# Altium PCB CmosTest20231115V2.PcbDoc (part 2 of 2)
Units mm, origin at the board's own origin, x right, y up, seen from the top; angles counter-clockwise.
Board outline 62.13 x 36.24 mm, 6 copper layers (Top Layer, GND, Signal Layer 1, Signal Layer 2, power, Bottom Layer), stack 1.231 mm thick; 74 components, 61 nets, 321 pads, 164 vias.
Unrouted connection lines stored in the file: 1.
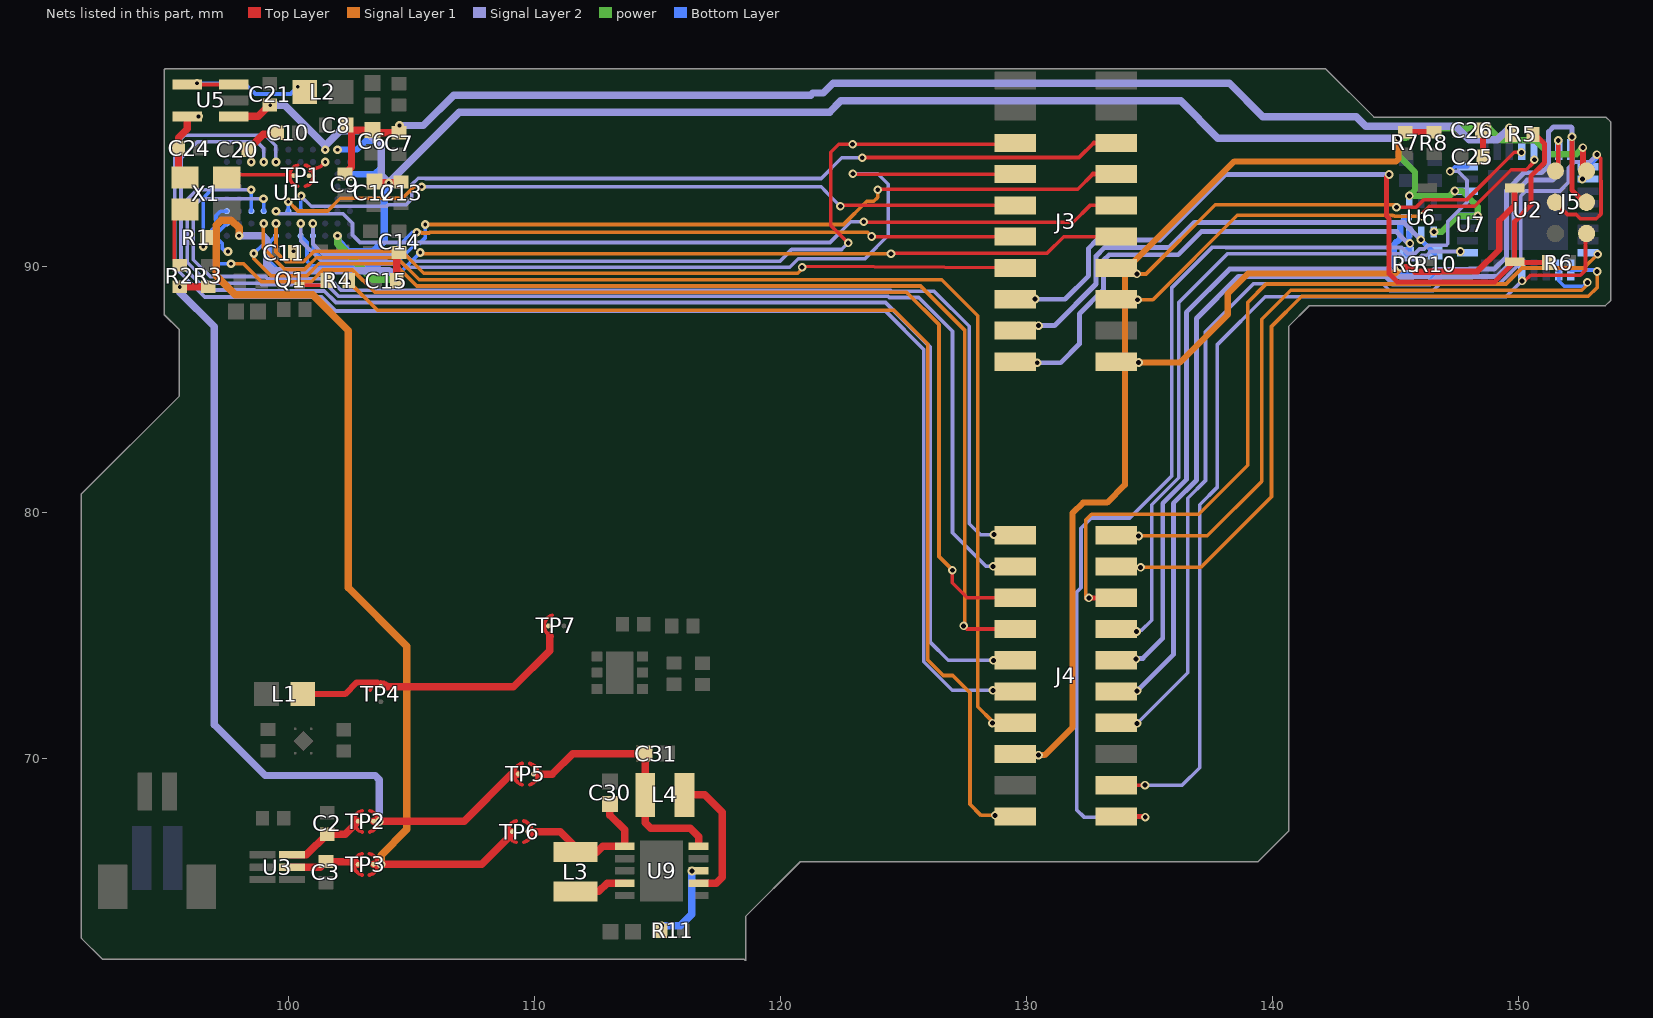
[diagram p6: the nets of this part, all layers, seen from the top]

## Via types
v1: diameter 0.35, hole 0.2, Top Layer to Bottom Layer, tented both sides, 97 vias
v2: diameter 0.35, hole 0.15, Top Layer to Bottom Layer, tented both sides, 53 vias
v3: diameter 0.356, hole 0.2, Top Layer to Bottom Layer, tented both sides, 13 vias
v4: diameter 0.356, hole 0.178, Top Layer to Bottom Layer, tented both sides, 1 vias

## Nets (pads, with @x,y where several pads share a name; then routed paths per layer and width w, separated by ;. In a path a pad name is that pad's centre, name@x,y a point inside that pad or via, vN(x,y) a via of type N, cw(c..) or ccw(c..) an arc to the next point about the centre after c; other vN are vias at no path point) (continued)
NetJ3_5: J3.5 U1.B8 | length 34.8
  Top Layer w0.15: v1(122.75,90.96) 122.04,91.67 122.04,94.64 122.37,94.97 v1(122.93,94.97) 129.485,94.97 J3.5@129.54,95.025
  Signal Layer 2 w0.15: v2(101,91.75) 101,90.914 101.414,90.5 104.75,90.5 105.03,90.22 119.98,90.22 120.45,90.69 122.49,90.69 122.49,90.7 v1(122.75,90.96)
NetJ3_6: J3.6 U1.C7 | length 35.3
  Top Layer w0.15: v1@123.4,94.43 132.13,94.43 132.725,95.025
  Top Layer w0.2: 132.725,95.025 J3.6@133.64,95.025
  Signal Layer 2 w0.15: v2(100.52,92.87) 100.52,92.86 100.93,92.45 104,92.45 104.06,92.51 104.78,92.51 105.01,92.74 105.01,93.325 105.275,93.59 105.565,93.59 105.575,93.58 121.65,93.58 122.49,94.42 v1(123.32,94.42)
  Bottom Layer w0.15: U1.C7@100.5,92.25 100.5,92.85 v2(100.52,92.87)
NetJ3_7: J3.7 U1.B7 | length 35.9
  Top Layer w0.15: v1@122.93,93.755 J3.7@129.54,93.755
  Signal Layer 2 w0.15: v2(100.5,91.75) 100.5,91.06 101.36,90.2 104.57,90.2 104.8,89.97 120.37,89.97 120.72,90.32 123.43,90.32 124.38,91.27 124.38,93.34 123.95,93.77 v1(122.94,93.77) v1@122.95,93.76
NetJ3_8: J3.8 U1.A7 | length 36.1
  Top Layer w0.15: v1@123.95,93.14 132.08,93.14 132.695,93.755
  Top Layer w0.2: 132.695,93.755 J3.8@133.64,93.755
  Signal Layer 1 w0.15: v2(105.57,91.71) 122.56,91.71 123.5,92.65 123.79,92.65 123.95,92.81 v1(123.95,93.12)
  Bottom Layer w0.15: U1.A7@100.5,91.25 100.76,90.99 100.76,90.22 100.947,90.032 103.699,90.032 103.757,90.09 104.35,90.09 105.06,90.8 105.095,90.8 105.215,90.92 105.31,90.92 105.57,91.18 v2(105.57,91.71)
NetJ3_9: J3.9 U1.C6 | length 30.8
  Top Layer w0.15: v1@122.455,92.485 J3.9@129.54,92.485
  Signal Layer 1 w0.15: v2(100,92.63) 100.02,92.63 100.39,92.26 101.6,92.26 102.11,92.77 104.636,92.77 105.106,93.24 v2(105.42,93.24)
  Signal Layer 2 w0.15: v2(105.42,93.24) 121.65,93.24 121.86,93.03 121.86,93.02 v1(122.43,92.45)
  Bottom Layer w0.15: U1.C6@100,92.25 v2(100,92.63)
NetJ3_10: J3.10 U1.C5 | length 35.5
  Top Layer w0.15: v1@123.45,91.8 131.89,91.8 132.575,92.485 J3.10@133.64,92.485
  Signal Layer 2 w0.15: v2(99.5,92.25) 99.61,92.14 102.23,92.14 102.61,91.76 102.61,91.28 102.91,90.98 122.01,90.98 122.85,91.82 v1(123.38,91.82)
NetJ3_11: J3.11 U1.A8 | length 29.8
  Top Layer w0.15: v1@123.7,91.215 J3.11@129.54,91.215
  Signal Layer 1 w0.15: v2(105.22,91.39) 105.395,91.39 105.425,91.36 105.715,91.36 105.745,91.39 123.53,91.39 v1(123.7,91.22)
  Bottom Layer w0.15: U1.A8@101,91.25 101.01,91.24 101.01,90.66 101.388,90.282 103.596,90.282 103.653,90.34 103.99,90.34 105.04,91.39 v2(105.22,91.39)
NetJ3_12: J3.12 U1.A5 | length 36.3
  Top Layer w0.15: v1@124.53,90.54 130.83,90.54 131.505,91.215 J3.12@133.64,91.215
  Signal Layer 1 w0.15: v2(105.36,90.57) 105.41,90.52 v1(124.49,90.52)
  Bottom Layer w0.15: U1.A5@99.5,91.25 99.27,91.02 99.27,90.19 99.677,89.783 103.803,89.783 103.86,89.84 104.63,89.84 v2(105.36,90.57)
NetJ3_13: J3.13 U1.B5 | length 32
  Top Layer w0.15: v1@120.95,90.01 J3.13@129.54,89.945
  Signal Layer 1 w0.15: v2(99.5,91.75) 99.5,90.59 99.9,90.19 100.613,90.19 101.043,90.62 104.61,90.62 105.5,89.73 120.7,89.73 120.88,89.91 v1(120.88,89.97)
NetJ3_14: J3.14 U2.12 | length 17.8
  Top Layer w0.15: v1(145.03,92.41) 145.85,92.41 145.845,92.415 146.15,92.72 147.89,92.72 149.81,94.64 v1(150.1,94.64)
  Signal Layer 1 w0.15: v1(134.48,89.7) 134.85,89.7 137.66,92.51 144.93,92.51 v1(145.03,92.41)
NetJ3_15: J3.15 R5.2 R6.1 U7.1 | length 34.2
  Top Layer w0.2: v1(144.73,93.74) 144.62,93.63 144.62,92.06 144.72,91.96 144.72,89.72 145.06,89.38 149.018,89.38 U7.1@149.827,90.189 ; R5.2@150.595,95.39 R5.2@150.575,95.37 150.66,95.37 151.04,94.99 151.04,94.219 150.49,93.669 150.49,92.49 149.827,91.827 U7.1@149.827,90.189 ; R6.1@151.185,90.16 149.856,90.16 U7.1@149.827,90.189
  Signal Layer 2 w0.2: v1(130.34,88.68) 130.35,88.67 131.56,88.67 132.52,89.63 132.52,90.74 132.86,91.08 135.41,91.08 138.07,93.74 v1(144.73,93.74)
NetJ3_16: J3.16 U2.13 | length 18.5
  Top Layer w0.15: v1@146.01,92.1 146.36,92.45 148.21,92.45 149.695,93.935 150.295,93.935 150.55,94.19 v1@150.55,94.26
  Signal Layer 1 w0.15: v1(134.51,88.65) 135.13,88.65 138.56,92.08 144.865,92.08 144.885,92.06 144.933,92.06 144.953,92.04 v1(146.06,92.04)
  other v1: 150.63,94.34
NetJ3_17: J3.17 R10.1 U6.6 | length 19.8
  Top Layer w0.2: J3.17@129.54,87.405 J3.17@130.255,87.405
  Signal Layer 2 w0.2: v1(130.48,87.6) 131.13,87.6 132.82,89.29 132.82,90.42 133.18,90.78 135.8,90.78 136.81,91.79 145.32,91.79 v1(146.02,91.09)
  Bottom Layer w0.2: v1(146.02,91.09) 146.572,90.538 R10.1@146.6,90.538
NetJ3_19: J3.19 R9.1 U6.7 | length 20.5
  Signal Layer 2 w0.2: v1(130.43,86.09) 131.38,86.09 132.15,86.86 132.15,88.08 133.12,89.05 133.12,90.25 133.35,90.48 136.16,90.48 137.1,91.42 145.02,91.42 v1@145.57,90.87 ; v1(145.57,90.94) v1@145.57,90.87 ; v1@145.58,90.86 v1@145.57,90.87
  Bottom Layer w0.2: R9.1@145.44,90.538 145.385,90.593 145.385,90.634 R9.1@145.54,90.789 ; R9.1@145.54,90.638 R9.1@145.54,90.789 ; U6.7@145.54,91.405 R9.1@145.54,90.79 ; v1(145.57,90.94) 145.57,90.9 145.61,90.86 R9.1@145.54,90.79
  Bottom Layer w0.254: R9.1@145.44,90.538 R9.1@145.54,90.638
NetJ4_1: J4.1 U1.C4 | length 47.5
  Signal Layer 2 w0.15: v2(98.99,92.76) 96.46,92.76 96.14,92.44 96.14,90.281 96.825,89.595 99.055,89.595 99.14,89.51 101.671,89.51 102.141,89.04 124.471,89.04 124.521,88.99 126.25,88.99 127.67,87.57 127.67,79.55 128.12,79.1 v1@128.67,79.1
  Bottom Layer w0.15: v2(98.99,92.76) 99,92.75 U1.C4@99,92.25
  other v1: 128.67,79.11
NetJ4_2: J4.2 U2.26 | length 28.2
  Signal Layer 1 w0.15: v1@134.55,79.06 137.34,79.06 139.55,81.27 139.55,87.86 140.73,89.04 152.55,89.04 152.78,89.27 v1(152.78,89.36)
  Bottom Layer w0.15: U2.26@151.616,89.856 151.616,89.424 151.84,89.2 152.62,89.2 v1(152.78,89.36)
  other v1: 134.55,79.05
NetJ4_3: J4.3 U1.C3 | length 48.9
  Signal Layer 2 w0.15: v2(98.5,93.12) 96.29,93.12 95.89,92.72 95.89,90.177 96.749,89.319 98.839,89.319 98.897,89.26 101.567,89.26 102.037,88.79 124.367,88.79 124.417,88.74 125.62,88.74 126.99,87.37 126.99,79.18 128.35,77.82 v1(128.64,77.82)
  Bottom Layer w0.15: U1.C3@98.5,92.25 v2(98.5,93.12)
NetJ4_4: J4.4 U2.25 | length 29
  Signal Layer 1 w0.15: v1(134.63,77.78) 137.08,77.78 139.95,80.65 139.95,87.56 141.18,88.79 152.82,88.79 153.18,89.15 v1(153.18,89.8)
  Bottom Layer w0.15: U2.25@152.115,89.856 153.124,89.856 v1(153.18,89.8)
NetJ4_5: J4.5 U1.C1 | length 46.9
  Top Layer w0.15: v1(126.98,77.66) 126.98,77.15 127.59,76.54 J4.5@129.54,76.54
  Signal Layer 1 w0.15: v2(97.67,90.11) 98.18,90.11 98.91,89.38 100.93,89.38 101.41,89.86 102.61,89.86 103.51,88.96 125.12,88.96 126.44,87.64 126.44,78.22 v1@126.99,77.67
  Bottom Layer w0.15: U1.C1@97.5,92.25 97.25,92.25 97.06,92.06 97.06,91.659 96.9,91.499 96.9,91.001 97.06,90.841 97.06,90.2 97.15,90.11 v2(97.67,90.11)
NetJ4_6: J4.6 U2.24 | length 33.6
  Top Layer w0.2: v1(132.53,76.54) J4.6@133.64,76.54
  Signal Layer 1 w0.15: v1(132.53,76.54) 132.43,76.54 132.4,76.51 132.4,79.7 132.64,79.94 136.99,79.94 138.98,81.93 138.98,88.54 139.73,89.29 149.48,89.29 150.13,89.94 152.64,89.94 v1(153.2,90.5)
NetJ4_7: J4.7 U1.A4 | length 45.8
  Top Layer w0.15: v1(127.44,75.4) 127.57,75.27 J4.7@129.54,75.27
  Signal Layer 1 w0.15: v2(98.6,90.53) 98.6,90.33 99.3,89.63 100.76,89.63 101.24,90.11 104.315,90.11 105.215,89.21 125.69,89.21 127.48,87.42 127.48,75.44 v1(127.44,75.4)
  Bottom Layer w0.15: v2(98.6,90.53) 99,90.93 U1.A4@99,91.25
NetJ4_8: J4.8 U2.1 | length 26.6
  Signal Layer 2 w0.15: v1@134.47,75.22 134.67,75.22 135.08,75.63 135.08,80.316 136.18,81.416 136.18,88.54 138.161,90.521 145.133,90.521 145.375,90.28 145.878,90.28 146.059,90.46 146.253,90.46 146.403,90.61 v1(147.62,90.61)
  other v1: 134.47,75.17
NetJ4_9: J4.9 U1.G4 | length 55.3
  Signal Layer 2 w0.15: v2(99,94.25) 99,94.8 98.73,95.07 96.31,95.07 95.64,94.4 95.64,90.074 96.667,89.047 98.633,89.047 98.67,89.01 101.464,89.01 101.934,88.54 124.264,88.54 126.07,86.734 126.07,86.526 126.07,74.74 126.81,74 v1(128.65,74)
NetJ4_10: J4.10 J5.4 U2.16 | length 40
  Top Layer w0.2: v1(152.16,95.27) 152.16,93.1 152.648,92.612 J5.4@152.751,92.612 J5.4@152.751,92.759
  Signal Layer 2 w0.2: v1(134.44,74.05) 134.47,74.08 134.72,74.08 135.53,74.89 135.53,80.378 136.49,81.338 136.49,88.14 138.25,89.9 144.74,89.9 144.805,89.835 144.805,89.785 144.995,89.595 146.272,89.595 146.552,89.875 147.97,89.875 147.995,89.9 149,89.9 149.5,90.4 149.5,93.1 150.21,93.81 150.92,93.81 151.21,94.1 151.21,95.48 151.4,95.67 152.12,95.67 152.16,95.63 v1(152.16,95.27)
NetJ4_11: J4.11 U1.G5 | length 57.9
  Signal Layer 2 w0.15: v2(99.5,94.25) 99.49,94.26 99.49,94.91 99.07,95.33 95.78,95.33 95.39,94.94 95.39,89.97 96.6,88.76 101.36,88.76 101.93,88.19 124.26,88.19 125.82,86.63 125.82,73.94 126.98,72.78 v1(128.63,72.78)
NetJ4_12: J4.12 J5.1 U2.15 | length 37.8
  Top Layer w0.2: J5.1@151.481,93.882 151.6,94.001 v1(151.6,95.12)
  Signal Layer 2 w0.2: v1(134.49,72.76) 135.96,74.23 135.96,80.383 136.9,81.323 136.9,87.89 138.61,89.6 144.565,89.6 144.87,89.295 146.396,89.295 146.676,89.575 148.095,89.575 148.12,89.6 149.124,89.6 149.8,90.276 149.8,92.976 150.334,93.51 151.37,93.51 151.6,93.74 v1(151.6,95.12)
NetJ4_13: J4.13 U1.B4 | length 48.4
  Signal Layer 1 w0.15: v2(99,91.75) 98.98,91.73 98.98,90.756 99.856,89.88 100.656,89.88 101.136,90.36 104.419,90.36 105.319,89.46 126.55,89.46 128.01,88 128.01,72.11 128.61,71.51 v1(128.61,71.45)
NetJ4_14: J4.14 J5.3 U2.17 | length 43.4
  Top Layer w0.15: J5.3@151.481,92.612 151.976,92.117 152.33,92.117 152.507,91.94 153.14,91.94 153.34,92.14 153.34,93.49 153.33,93.5 153.33,94.39 v1(153.17,94.55)
  Signal Layer 2 w0.15: v1(134.49,71.44) 136.55,73.5 136.55,80.584 137.27,81.304 137.27,87.35 139.22,89.3 144.477,89.3 144.756,89.02 146.51,89.02 146.79,89.3 149.213,89.3 150.075,90.162 150.075,92.862 150.283,93.07 151.67,93.07 152,93.4 152,93.99 152.26,94.25 152.87,94.25 v1(153.17,94.55)
  Bottom Layer w0.15: U2.17@152.816,94.056 153.17,94.41 v1(153.17,94.55)
NetJ4_18: J4.18 J5.6 U2.29 | length 38.9
  Top Layer w0.15: J4.18@133.64,68.92 134.8,68.92 v1(134.81,68.93) ; v1(150.13,89.42) 150.24,89.42 150.47,89.65 152.5,89.65 152.71,89.86 152.71,91.301 J5.6@152.751,91.342
  Signal Layer 2 w0.15: v1(134.81,68.93) 136.32,68.93 137.03,69.64 137.03,80.32 137.75,81.04 137.75,86.83 139.69,88.77 149.48,88.77 v1(150.13,89.42)
NetJ4_19: J4.19 R4.1 | length 45.4
  Signal Layer 1 w0.15: v2(102.45,89.39) 103.62,88.22 124.61,88.22 125.98,86.85 125.98,74.01 126.61,73.38 127,73.38 127.7,72.68 127.7,68.15 128.15,67.7 v1(128.72,67.7)
NetJ4_20: J4.20 U2.8 | length 44.5
  Top Layer w0.2: J4.20@133.64,67.65 134.8,67.65 v1(134.82,67.63)
  Signal Layer 2 w0.15: v1(134.82,67.63) 132.33,67.63 132.03,67.93 132.03,76.77 132.21,76.95 132.21,79.37 132.62,79.78 134.19,79.78 135.89,81.48 135.89,89.13 137.55,90.79 138.076,90.79 138.095,90.771 145.164,90.771 145.237,90.771 145.478,90.53 145.775,90.53 145.94,90.695 145.955,90.71 146.149,90.71 146.299,90.86 147.04,90.86 147.11,90.93 147.11,91.83 147.89,92.61 147.89,93.51 147.53,93.87 v1(147.21,93.87)
  Bottom Layer w0.15: v1(147.21,93.87) 147.396,94.056 U2.8@147.916,94.056
NetL1_1: L1.1 TP4.1 TP7.1 | length 11.1
  Top Layer w0.25: L1.1@100.585,72.63 102.31,72.63 102.78,73.1 103.602,73.1 103.611,73.091
  Top Layer w0.304: 103.96,72.92 104.129,72.92 109.15,72.92 110.62,74.39 110.62,75.014
NetL2_1: L2.1 U5.3 U5.4 | length 7
  Top Layer w0.15: U5.4@95.949,97.4 U5.3@97.79,97.4 97.849,97.4 U5.3@97.939,97.31 ; L2.1@100.285,97.48 L2.1@100.669,97.095
  Bottom Layer w0.15: v2(96.29,97.45) 98.23,97.45 98.67,97.01 100.09,97.01 v2(100.38,97.3)
NetL3_2: L3.2 U9.4 | length 2.1
  Top Layer w0.304: L3.2@111.67,64.61 112.62,64.61 112.954,64.944 U9.4@113.67,64.944
NetL4_2: L4.2 U9.7 | length 5.5
  Top Layer w0.304: L4.2@116.1,68.53 116.92,68.53 117.63,67.82 117.63,65.18 117.394,64.944 U9.7@116.67,64.944
NetQ1_1: Q1.1 R4.2 | length 1.2
  Top Layer w0.15: Q1.1@100.457,89.238 101.381,89.238 R4.2@101.573,89.43
NetR1_1: R1.1 U1.E1 | length 3.1
  Bottom Layer w0.15: v2(96.55,90.81) 96.55,92.8 97,93.25 U1.E1@97.5,93.25
NetR2_2: R2.2 X1.1 | length 2.5
  Top Layer w0.15: R2.2@95.59,90.061 95.36,90.291 95.36,91.873 X1.1@95.8,92.313
NetR11_1: R11.1 U9.8 | length 3.2
  Bottom Layer w0.305: v1(115.17,63.22) 115.93,63.22 116.4,63.69 v3(116.4,65.44)
NetTP1_1: TP1.1 X1.3 | length 3.2
  Top Layer w0.15: X1.3@97.05,93.728 TP1.1@100.209,93.728
NetTP1_2: TP1.2 U1.G9 | length 0.7
  Top Layer w0.152: 100.872,93.903 101.302,94.052 v2(101.5,94.25)
V1.8: C3.2 TP3.2 U3.5 | length 2.8
  Top Layer w0.304: U3.5@100.145,65.595 101.303,65.595 C3.2@101.53,65.822 102.677,65.822 102.726,65.822 TP3.2@102.838,65.71
V1.8B: C30.1 L3.1 TP6.2 U9.1 | length 6.3
  Top Layer w0.304: 109.899,67.04 111.05,67.04 111.67,66.42 L3.1@111.67,66.21 112.54,66.21 112.774,66.444 U9.1@113.67,66.444 113.67,67.11 113.07,67.71 C30.1@113.07,68.17
V1P8: C12.2 C13.1 C14.1 C15.1 C21.1 C25.1 C26.2 J4.15 J5.2 R7.1 R8.1 TP3.1 TP6.1 U1.A2 U1.A10 U1.H9 U2.4 U2.6 U2.18 U5.1 U6.1 U6.5 | length 165.1
  Top Layer w0.25: C12.2@103.5,93.45 C12.2@103.518,93.432 ; R7.1@145.38,95.465 R8.1@146.55,95.465 ; C26.2@148.535,95.533 148.535,94.46 C25.1@148.543,94.453 ; v1(152.6,94.83) 152.6,94.033 J5.2@152.751,93.882
  Top Layer w0.305: U5.1@97.79,96.1 98.782,96.1 C21.1@99.25,96.568 ; TP3.1@103.462,65.71 103.637,65.71 v3(103.77,65.71) 107.86,65.71 108.979,66.829 109.1,66.95 TP6.1@109.1,67.04 ; C12.2@103.518,93.432 103.54,93.41 v2(104.08,93.41) 104.558,93.41 C13.1@104.58,93.432 ; C15.1@104.41,89.43 104.41,90.478 C14.1@104.5,90.568
  power w0.25: v1(146.55,91.415) 146.875,91.415 147.52,92.06 v1(148.33,92.06) 148.33,92.43 147.69,93.07 v1(147.4,93.07) 147.2,92.87 v1(145.55,92.87) 145.55,92.9 145.78,93.13 145.78,93.83 145.11,94.5 v1(145.11,95.22) 145.42,95.22 145.82,95.62 v1(148.66,95.62) 148.8,95.62 149.29,95.13 150.67,95.13 151.24,94.56 152.33,94.56 v1(152.6,94.83)
  power w0.305: v2(102,91.25) 102,90.92 103.43,89.49 v2(104.44,89.49)
  Signal Layer 1 w0.25: v1(130.48,70.15) 130.73,70.15 131.87,71.29 131.87,79.99 132.29,80.41 133.27,80.41 133.99,81.13 133.99,89.82 138.44,94.27 145.01,94.27 145.11,94.37 v1(145.11,95.22)
  Signal Layer 1 w0.305: v2(98,91.25) 98,91.58 97.69,91.89 97.28,91.89 97.073,91.683 97.073,89.617 97.84,88.85 100.99,88.85 102.445,87.395 102.445,76.945 104.82,74.57 104.82,67.13 103.77,66.08 v3(103.77,65.71)
  Signal Layer 2 w0.305: v2(98,91.25) 98.97,91.25 99.13,91.09 99.13,90.07 99.363,89.837 101.806,89.837 101.814,89.83 104.1,89.83 v2(104.44,89.49) ; v2(99.27,96.556) 99.854,96.556 v2@101.5,94.91 ; v2(101.5,94.75) v2@101.5,94.91 ; v1(145.11,95.22) 137.76,95.22 136.252,96.728 122.448,96.728 121.99,96.27 106.94,96.27 v2(104.08,93.41) 103.77,93.72 103.77,94.9 103.15,95.52 102.11,95.52 v2@101.5,94.91
  Bottom Layer w0.305: v2(102,91.25) 102,91.04 102.43,90.61 103.46,90.61 103.89,91.04 103.89,92.95 104.08,93.14 v2(104.08,93.41)
  other v1: 152.58,93.55
V3.3: C2.2 TP2.2 U3.6 | length 3.3
  Top Layer w0.304: U3.6@100.145,66.095 100.737,66.095 C2.2@101.58,66.938 102.318,66.938 102.691,67.311 TP2.2@102.84,67.46
V3.3B: C31.2 L4.1 TP5.2 U9.10 | length 10.3
  Top Layer w0.304: 110.139,69.38 110.72,69.38 111.55,70.21 C31.2@114.48,70.21 114.5,70.19 L4.1@114.5,68.53 114.5,67.4 114.73,67.17 116.33,67.17 116.67,66.83 U9.10@116.67,66.444
V3P3: C6.2 C7.1 C8.1 C9.1 C10.1 C11.1 C20.1 C24.1 J3.20 R2.1 R3.1 R5.1 R9.2 R10.2 TP2.1 TP5.1 U1.B1 U1.F11 U1.G3 U1.H10 U1.H11 U5.5 U6.8 U7.5 X1.4 | length 121.3
  Top Layer w0.15: C20.1@98.364,94.75 C20.1@98.5,94.614 ; C6.2@103.42,95.54 C6.2@103.527,95.432
  Top Layer w0.2: v2(98.5,94.25) C20.1@98.5,94.614
  Top Layer w0.25: v1(145.18,89.98) 145.593,89.98 145.784,89.789 146.77,89.789 146.781,89.8 148.31,89.8 149.2,90.69 149.2,91.87 149.827,92.497 U7.5@149.827,93.189
  Top Layer w0.3: X1.4@95.8,93.613 95.54,93.873 C24.1@95.54,94.815 95.54,95.24 95.89,95.59 U5.5@95.89,96.1 ; C20.1@98.364,94.75 98.984,95.37 99.477,95.37 C10.1@99.547,95.44 ; C9.1@102.3,93.76 102.57,94.03 C8.1@102.57,95.551 ; C8.1@102.371,95.75 C8.1@102.57,95.551 ; C6.2@103.42,95.54 102.582,95.54 C8.1@102.57,95.551 ; C6.2@103.527,95.432 C7.1@104.5,95.432
  Top Layer w0.304: R2.1@95.59,89.171 R3.1@96.75,89.171 ; TP2.1@103.465,67.46 103.639,67.46 107.14,67.46 109.06,69.38 109.165,69.38 TP5.1@109.34,69.38
  Signal Layer 1 w0.25: v1(134.55,86.1) 136.22,86.1 138.17,88.05 138.17,88.89 139,89.72 144.99,89.72 145.18,89.91 v1(145.18,89.98)
  Signal Layer 2 w0.3: v2(104.52,95.73) 105.49,95.73 106.72,96.96 121.22,96.96 121.31,97.05 121.73,97.05 122.13,97.45 138.24,97.45 139.6,96.09 143.39,96.09 143.78,95.7 147.43,95.7 147.982,95.148 149.128,95.148 v1(149.61,95.63)
  Signal Layer 2 w0.304: v2(95.59,89.17) 95.59,88.96 97,87.55 97,71.38 99.06,69.32 103.529,69.32 103.699,69.15 v3(103.699,67.449)
  Bottom Layer w0.15: U1.B1@97.5,91.75 97.31,91.56 97.31,91.555 97.15,91.395 97.15,91.105 97.31,90.945 97.31,90.75 97.45,90.61 v2(97.55,90.61)
  Bottom Layer w0.25: v2(102,94.75) U1.H11@102.5,94.75 102.79,94.75 103.15,95.11 103.6,95.11 103.79,94.92 103.79,94.04 103.5,93.75 U1.F11@102.5,93.75 ; U6.8@145.44,92.005 145.44,92 145.41,91.97 145.427,91.97 145.18,91.723 145.18,91.126 145.072,91.018 145.047,91.018 144.915,90.886 144.915,90.045 145.312,89.648 R9.2@145.44,89.648 R10.2@146.6,89.648
  other v2: 100.21,90.62 96.35,96.1
pads on no net: J2.3 J2.4 J4.16 U1.B11 U1.C10 U1.C11 U1.D1 U1.D10 U1.D11 U1.E10 U1.E11 U1.F1 U1.F2 U1.F10 U1.G1 U1.G10 U1.H1 U1.H2 U1.H3 U1.H4 U2.2 U2.7 U2.9 U2.10 U2.11 U2.14 U2.19 U2.20 U2.22 U2.23 U2.30 U2.31 U2.32 U10.2 U10.3 U10.5

## Polygon pours and split planes (outlines as drawn)
GND on Top Layer "GND_L01_P020" (solid, remove dead copper, pour order 20): 130.637,68.53 118.33,68.53 116.98,69.88 115.55,69.88 115.55,73.24 115.61,73.3 117.34,73.3 117.34,70.69 117.66,70.37 126.49,70.37 127.37,69.49 130.665,69.49 130.665,69.465 130.65,69.37
no net on Top Layer "Top Layer-No Net" (solid, remove dead copper, pour order 6): 100.25,69.46
NetC1_2 on Top Layer "Battery+2" (solid, remove dead copper, pour order 4): 97.94,68.24 97.94,70.31 98.24,70.61 99.899,70.61 100,70.18 99.6,69.46 99.6,68.63 99.21,68.24
no net on Top Layer "Top Layer-No Net 1" (solid, remove dead copper, pour order 2): 99.25,67.77
NetC1_2 on Top Layer "Battery+" (solid, pour order 0): 93.89,68.07 94.42,68.07 94.58,67.91 94.58,67.26 95.061,67.052 98.37,67.07 98.979,67.91 99.29,67.91 99.29,64.88 99.31,64.86 98.37,64.86 98.07,65.16 98.07,66.29 94.34,66.29 93.77,66.86 93.77,67.82 93.83,68.01
GND on Bottom Layer "GND1" (solid, remove dead copper, pour order 30): 126.32,66.51 136.67,66.51 136.67,97.19 136.19,97.67 126.8,97.67 126.32,97.19
NetC1_2 on Bottom Layer "Bateery+4" (solid, remove dead copper, pour order 10): 98.5,65.16 98.66,65.16 112.98,65.16 112.98,64.92 113.37,64.53 113.37,64.41 113.37,62.79 111.15,62.79 110.66,63.28 110.66,63.78 98.63,63.78 98.38,64.07 98.35,64.1 98.38,65.16
NetC1_2 on Bottom Layer "Bottom Layer-NetC1_2" (solid, remove dead copper, pour order 8): 114.29,73.05 115.04,73.05 115.34,72.75 115.34,67.48 114.33,66.47 114.065,65.145 113.37,64.45 113.37,62.79 113.25,62.67 112.73,62.67 112.73,66.09 113.35,66.71 113.35,71.88 114.02,72.55 114.02,73.05
GND on GND "GND_L02_P012" (solid, remove dead copper, pour order 12): 95.02,97.98 95.04,98 104.98,98 104.98,88.01 104.98,87.965 104.7,87.61 95.44,87.61 94.99,88.07 94.99,98.04
GND on GND "GND_L02_P014" (solid, remove dead copper, pour order 14): 144.15,95.53 144.66,96.04 153.52,96.04 153.68,95.88 153.72,95.88 153.72,88.68 153.48,88.44 153.48,88.41 144.76,88.41 144.14,89.03 144.14,95.5
GND on GND "GND_L02_P018" (solid, remove dead copper, pour order 18): 92.08,76.33 118.47,76.33 119.66,75.14 119.66,65 118.48,63.82 118.13,63.82 118.12,62.57 118.07,62.57 92.36,62.57 92.01,63.05 92.01,63.54 92.01,76.26
no net on GND "GND1" (solid, remove dead copper, pour order 16): 153.72,92.28
no net on Mechanical 1 "GND1" (solid, remove dead copper): 118.16,62.63
V3P3 on power "V3P3_L05_P024" (solid, remove dead copper, pour order 24): 95.21,97.89 104.99,97.89 104.99,87.92 104.83,87.76 95.37,87.76 95.21,87.92
V3P3 on power "V3P3_L05_P026" (solid, remove dead copper, pour order 26): 144.21,95.61 144.58,95.98 153.36,95.98 153.61,95.73 153.61,88.76 153.38,88.53 144.79,88.53 144.21,89.11 144.23,89.13 144.23,95.64
V3P3 on power "GND1" (solid, remove dead copper, pour order 28): 92.46,75.77 92.92,76.23 118.27,76.23 119.35,75.15 119.35,65.48 117.9,64.03 117.9,63.69 117.32,63.11 92.37,63.11 92.37,63.4 92.29,63.69 92.29,63.9 92.29,75.77

## Other copper
Top Layer:
  region net GND: 115.4,70.72 115.38,70.7 115.38,70.21 116.075,70.21 116.212,70.347 116.212,70.648 115.98,70.88 115.93,70.83 115.4,70.83
  region net NetC1_2: 98.365,66.925 98.55,67.3 99,67.3 99,65.02 98.74,64.76 98.46,64.76 98.36,64.86 98.35,64.99
  region: 94.32,66.6
  region net NetC1_2: 94.85,66.29 95.315,66.645 94.4,67.56 94.4,67.92 93.89,67.92 93.89,66.38
  region: 95.79,75.99
  pour cut-out: 94.32,66.6 94.54,66.6 94.88,66.26 94.88,66.21 94.42,66.21 94.32,66.31
Bottom Layer:
  region net NetC1_2: 113.248,66.372 113.278,66.402 114.038,66.402 114.038,65.579 114.019,65.56 113.09,65.56 113.052,65.598
  pour cut-out: 113.63,65.57 114.15,65.57 114.15,65.04 113.7,64.59 113.37,64.45 113.43,64.85 113.43,65.49 113.57,65.63

## Silkscreen, mask and mechanical layers (free items; w line width, h text height)
Top Overlay:
  text "Dout0" at 124.27,97.27 h0.6
  text "Dout1" at 136.02,97.25 h0.6
  text "Dout2" at 121.65,95.9 h0.6
  text "Dout3" at 137.84,95.87 h0.6
  text "Dout5" at 135.98,94.72 h0.6
  text "Dout4" at 124.28,94.64 h0.6
  text "MOSI_C" at 150.44,94.52 h0.3
  text "V1P8" at 153.97,93.77 h0.4
  text "Dout7" at 137.84,93.45 h0.6
  text "Dout6" at 121.65,93.41 h0.6
  text "MISO_C" at 153.87,92.61 h0.4
  text "Dout9" at 136.03,92.31 h0.6
  text "Dout8" at 124.28,92.22 h0.6
  text "RESET_N_ISP" at 153.9,91.03 h0.4
  text "FV" at 136.84,91.01 h0.6
  text "Pix_CLK" at 121.65,90.99 h0.6
  text "GND" at 150.33,90.57 h0.3
  text "ENT1" at 136.21,89.84 h0.6
  text "LV" at 124.92,89.68 h0.6
  text "ENT2" at 136.81,88.57 h0.6
  text "IR_Receive" at 121.65,88.39 h0.6
  text "GND" at 135.92,87.19 h0.6
  text "SCL_3V3" at 122.91,87.03 h0.6
  text "V3P3" at 136.749,85.83 h0.6
  text "SDA_3V3" at 121.56,85.66 h0.6
  text "RESET_N" at 122.9,79.1 h0.6
  text "RESET_N_C" at 135.97,79 h0.5
  text "TRIGGER0" at 121.59,77.66 h0.6
  text "TRIGGER0_C" at 134.66,77.56 h0.5
  text "VDD_PIX_3.3_B" at 107.75,76.76 h0.5
  text "MONITOR0" at 122.59,76.42 h0.6
  text "MONITOR0_C" at 135.66,76.32 h0.5
  text "SS_N" at 122.34,75.24 h0.6
  text "SS_N_C" at 135.41,75.14 h0.5
  text "MISO" at 124.22,73.98 h0.6
  text "MISO_C" at 137.29,73.88 h0.5
  text "VDD_PIX_3.3" at 101.75,73.83 h0.5
  text "MOSI" at 122.36,72.75 h0.6
  text "MOSI_C" at 135.43,72.65 h0.5
  text "SCK" at 124.32,71.44 h0.6
  text "SCK_C" at 137.39,71.34 h0.5
  text "V3.3_B" at 108.33,70.43 h0.5
  text "GND" at 95.51,70.13 h0.5
  text "V1P8" at 122.55,70.05 h0.6
  text "Bat+" at 92.15,69.88 h0.5
  text "GND" at 124.17,68.72 h0.6
  text "RESET_N_ISP" at 135.31,68.69 h0.5
  text "V3.3" at 102.75,68.37 h0.5
  text "LED_Control" at 121.28,67.44 h0.6
  text "LED" at 135.73,67.25 h0.5
  text "V1.8_B" at 107.5,64.81 h0.5
  text "V1.8" at 103.12,64.35 h0.5
Bottom Overlay:
  lines w0.05: 95.61,87.46 104.68,87.46 106,88.78 106,98.02 ; 144.12,88.46 144.12,96.07
  text "Bat+" at 93.67,68.33 h0.5
  text "GND" at 97.37,68.27 h0.5
Mechanical 1:
  lines w0.05: 95.01,93 105,93 ; 100.005,93 100.005,93.255 ; 95,88.5 105,88.5 105,98 95,98 95,88.5 ; 144.15,89 144.15,95.5 144.7,96.05 153.52,96.05 153.7,95.87 153.7,88.65 153.47,88.42 144.73,88.42 144.15,89
BoardLine:
  lines w0.05: 91.62,62.72 91.62,80.75 94.98,84.11 95.6,84.73 95.6,87.44 94.98,88.06 94.98,88.18 94.98,97.99 95.01,98.02 142.13,98.02 144.1,96.05 153.52,96.05 153.7,95.87 153.7,88.63 153.5,88.43 141.47,88.43 140.62,87.58 140.62,67.55 140.62,67.07 139.39,65.84 120.79,65.84 118.57,63.62 118.57,61.83 118.53,61.87 92.47,61.87 91.62,62.72